# Altium PCB CU100_Weld_V1.0.PcbDoc
Units mm, origin at the board's own origin, x right, y up, seen from the top; angles counter-clockwise.
Board outline 100 x 85 mm, 2 copper layers (Top Layer, Bottom Layer); 31 components, 23 nets, 103 pads, 0 vias.
Unrouted connection lines stored in the file: 61.
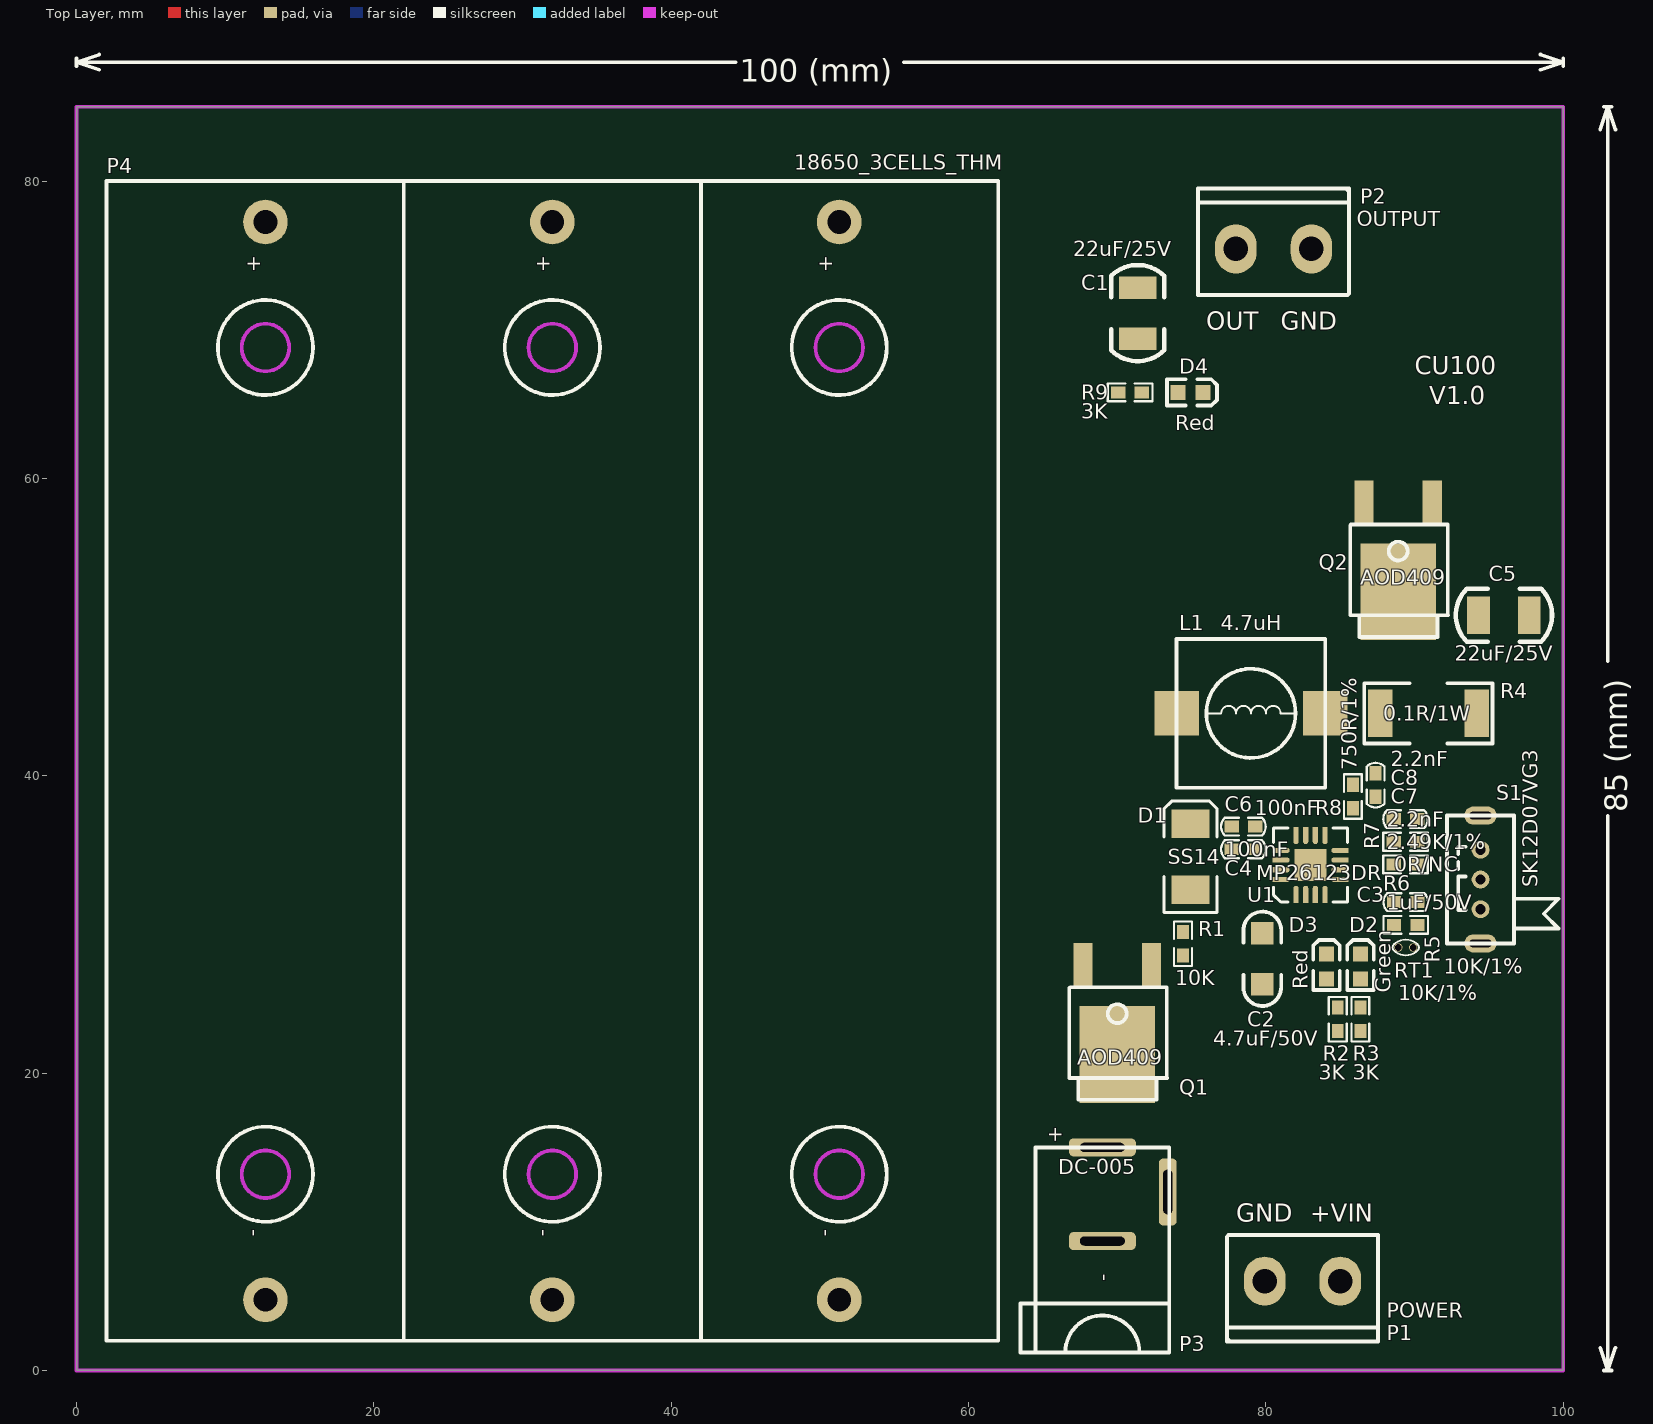
[diagram p0: Top Layer view]
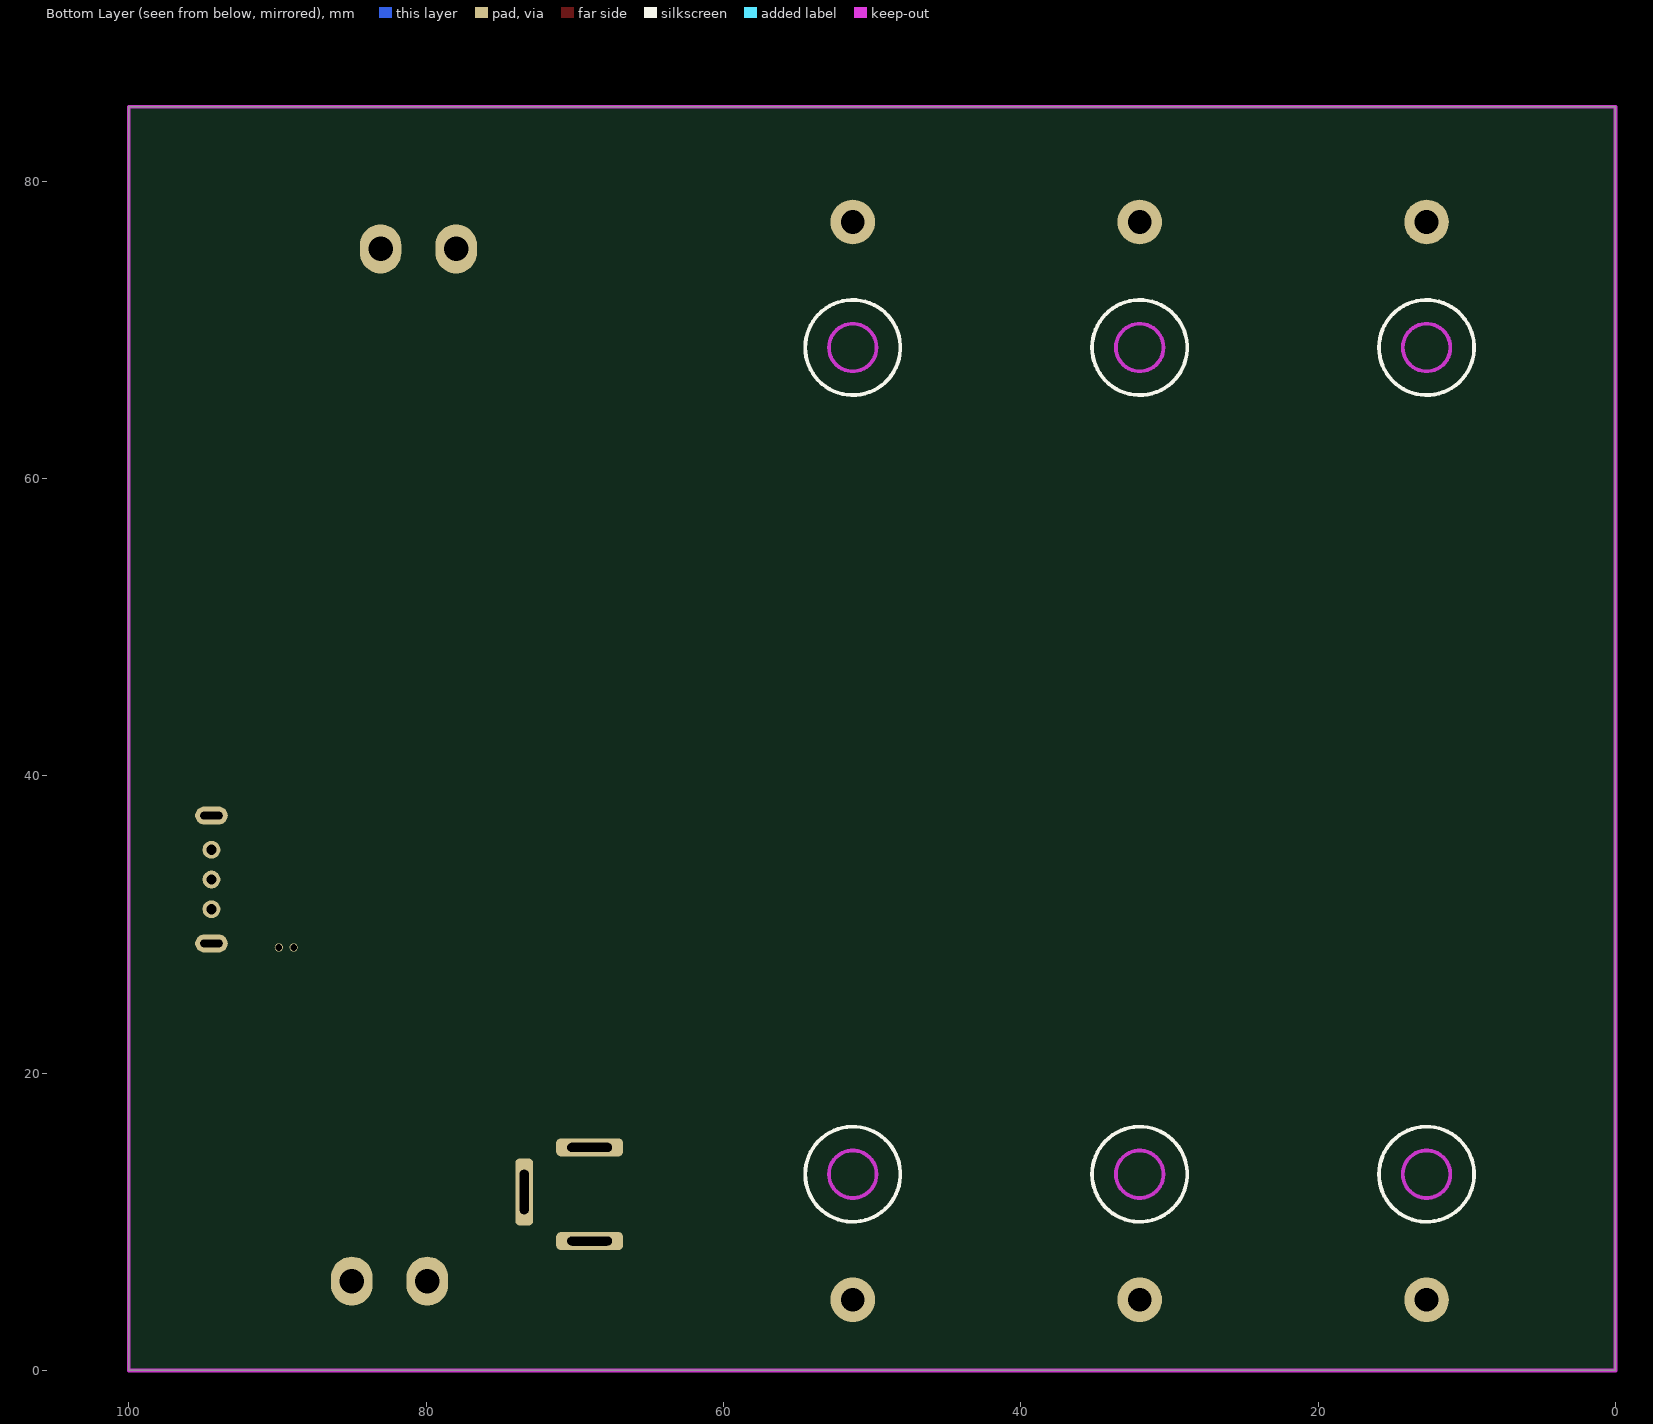
[diagram p1: Bottom Layer view, seen from below]

## Layer stack, top to bottom
Top Layer: signal copper 0.0356
Dielectric: dielectric 0.32, FR-4, Dk 4.8
Bottom Layer: signal copper 0.0356

## Board outline
0,0 100,0 100,85 0,85

## Design rules (kind name [scope] priority, off if disabled: settings)
Clearance [All] p1: gap=0.254
HoleSize [All] p1: absolutevalues=TRUE maxlimit=25.4 minlimit=0.025 maxpercent=80.000 minpercent=20.000
MinimumSolderMaskSliver [All] p1: minsoldermaskwidth=0
PolygonConnect isvia [isvia] p1: connectstyle=Direct reliefconductorwidth=0.254 reliefentries=4 polygonreliefangle="90 Angle"
PolygonConnect [All] p2: connectstyle=Relief reliefconductorwidth=0.762 reliefentries=4 polygonreliefangle="90 Angle"
RoutingVias [All] p1: holewidth=0.711 width=1.27 viastyle="Through Hole" minholewidth=0.711 minwidth=1.27 maxholewidth=0.711 maxwidth=1.27
SilkToSilkClearance [All] p1: silktosilkclearance=0
SilkscreenOverComponentPads [All] p1: minsilkscreentomaskgap=0
SolderMaskExpansion [All] p1: expansion=0.102
Width [All] p1: maxlimit=100 minlimit=0.254 preferedwidth=0.254
24 further rules are at their usual default settings.

## Components (designator, comment, footprint, x,y, rotation, side; value= is the part's Value field where it differs from the comment)
C1 "22uF/25V" 1210_C 71.374,71.12 r270 top
C2 "4.7uF/50V" 1206_C 79.756,27.686 r270 top
C3 "1uF/50V" 0603_CN 89.408,31.496 r0 top
C4 "100nF" 0603_CN 78.486,35.052 r0 top
C5 "22uF/25V" 1210_C 96.012,50.8 r0 top
C6 "100nF" 0603_CN 78.486,36.576 r180 top
C7 "2.2nF" 0603_CN 89.392,37.084 r0 top
C8 "2.2nF" 0603_CN 87.376,39.37 r90 top
D1 "SS14" DO-214AC(SMA) 74.93,34.544 r270 top
D2 "Green" 0603_LED 86.36,27.178 r270 top
D3 "Red" 0603_LED 84.074,27.178 r270 top
D4 "Red" 0603_LED 74.93,65.786 r180 top
L1 "4.7uH" CDRH104 78.994,44.196 r0 top
P1 "POWER" KF5.08-2P 85,6 r180 top locked
P2 "OUTPUT" KF5.08-2P 77.978,75.438 r0 top locked
P3 "DC-005" DC-5.5-2.1mm 69,15 r90 top locked
P4 "18650_3CELLS_THM" 18650_3CELLS_THM 2,80 r270 top locked
Q1 "AOD409" TO-252 70,24 r180 top
Q2 "AOD409" TO-252 88.9,55.118 r180 top
R1 "10K" 0603_RN 74.422,28.702 r90 top
R2 "3K" 0603_RN 84.836,23.622 r90 top
R3 "3K" 0603_RN 86.36,23.622 r270 top
R4 "0.1R/1W" 2512_R 90.932,44.196 r0 top
R5 "10K/1%" 0603_RN 89.408,29.972 r180 top
R6 "0R/NC" 0603_RN 89.392,34.036 r180 top
R7 "2.49K/1%" 0603_RN 89.392,35.56 r180 top
R8 "750R/1%" 0603_RN 85.852,38.608 r270 top
R9 "3K" 0603_RN 70.866,65.786 r0 top
RT1 "10K/1%" RT3950K 89.408,28.448 r180 top
S1 "SK12D07VG3" SK12D07VG3 94.488,33.02 r90 top
U1 "MP26123DR" QFN16(4X4) 83,34 r90 top

## Footprints (in the part's own frame and the unit in brackets; to place one, negate y for a bottom-side part, rotate by r counter-clockwise, add the part's x,y. Pads: shape width x height; smd on the part's side, far side on the other; paste and mask are expansions set on the pad)
0603_CN [mm] "SMD Resistor"
  rect 0.96x0.8 smd: 1(-0.79,0) 2(0.79,0)
  silkscreen extent -1.5,-0.6 1.5,0.6
0603_LED [mil] "SMD LED"
  rect 40x40 smd: A(33,0) K(-33,0)
  silkscreen extent -70,-35 63,35
0603_RN [mm] "SMD Resistor"
  rect 0.96x0.8 smd: 1(-0.79,0) 2(0.79,0)
  silkscreen extent -1.5,-0.6 1.5,0.6
1206_C [mil] "SMD Capacitor"
  rect 60x60 smd: 1(-67.5,0) 2(67.5,0)
  silkscreen extent -125,-50 125,50
1210_C [mil] "SMD Capacitor"
  rect 60x100 smd: 1(-67.5,0) 2(67.5,0)
  silkscreen extent -127,-70 127,70
2512_R [mm] "SMD Resistor"
  rect 1.65x3.2 smd: 1(-3.24,0) 2(3.24,0)
  silkscreen extent -4.32,-2.03 4.32,2.03
18650_3CELLS_THM [mm]
  round 3 hole 1.6: 1(2.75,10.7) 2(75.25,10.7) 3(2.75,30) 4(75.25,30) 5(2.75,49.3) 6(75.25,49.3)
  Keep-Out Layer circle w0.254: c11.195,49.3 r1.6
  Keep-Out Layer circle w0.254: c11.195,30 r1.6
  Keep-Out Layer circle w0.254: c11.195,10.7 r1.6
  Keep-Out Layer circle w0.254: c66.805,10.7 r1.6
  Keep-Out Layer circle w0.254: c66.805,30 r1.6
  Keep-Out Layer circle w0.254: c66.805,49.3 r1.6
  silkscreen extent 0,0 78,60
CDRH104 [mm] "SMD Power Inductance,L=10mm,W=10mm,H=4.2mm"
  rect 3x3 smd: 1(-5,0) 2(5,0)
  silkscreen extent -5,-5 5,5
DC-5.5-2.1mm [mm]
  rrect50% 1.2x4.5 hole 0.6 slot 3 at 90 deg: 1(0,0) 2(-6.3,0)
  rrect50% 4.5x1.2 hole 0.6 slot 3 at 0 deg: 3(-3,-4.4)
  silkscreen extent -13.8,-4.5 0,5.5
DO-214AC(SMA) [mil] "SMD Diode"
  rect 75x100 smd: A(87.5,0) K(-87.5,0)
  silkscreen extent -147,-70 148,70
KF5.08-2P [mil]
  oval 110x130 hole 65: 1(0,0) 2(200,0)
  silkscreen extent -100,-122 300,160
QFN16(4X4) [mm]
  rect 0.5x0.35 smd: 1(-2.3,0.975) 2(-2.3,0.325) 3(-2.3,-0.325) 4(-2.3,-0.975) 9(2.3,-0.975) 10(2.3,-0.325) 11(2.3,0.325) 12(2.3,0.975)
  oval 1x0.35 smd: 1(-1.9,0.975) 2(-1.9,0.325) 3(-1.9,-0.325) 4(-1.9,-0.975) 9(1.9,-0.975) 10(1.9,-0.325) 11(1.9,0.325) 12(1.9,0.975)
  rect 0.35x0.5 smd: 5(-0.975,-2.3) 6(-0.325,-2.3) 7(0.325,-2.3) 8(0.975,-2.3) 13(0.975,2.3) 14(0.325,2.3) 15(-0.325,2.3) 16(-0.975,2.3)
  oval 0.35x1 smd: 5(-0.975,-1.9) 6(-0.325,-1.9) 7(0.325,-1.9) 8(0.975,-1.9) 13(0.975,1.9) 14(0.325,1.9) 15(-0.325,1.9) 16(-0.975,1.9)
  rect 2.16x2.16 smd: PAD(0,0)
  silkscreen extent -2.5,-2.5 2.5,2.5
RT3950K [mm]
  round 0.55 hole 0.45: 1(-0.5,0) 2(0.5,0)
  silkscreen extent -0.88,-0.53 0.88,0.53
SK12D07VG3 [mm]
  oval 1.2x2.2 hole 0.5 slot 1.5 at 90 deg: 0(-4.3,0.05) 0(4.3,0.05)
  round 1.2 hole 0.7: 1(-2,0.05) 2(0,0.05) 3(2,0.05)
  silkscreen extent -4.3,-5.2 4.3,2.3
TO-252 [mm] "SMD IC"
  rect 1.3x3 smd: 1(-2.3,-3.245) 3(2.3,-3.245)
  rect 5.08x6.5 smd: 2(0,2.75)
  silkscreen extent -3.35,-1.78 3.22,5.79

## Part data
C1 C2 C3 C4 C5 C6 C7 C8: library part Cap1
D1: library part Diode-A, "SS14,SS24,SS34,M7"
D2 D3 D4: library part LED
L1: library part Inductor
P1 P2: library part "Header 2", "Header, 2-Pin"
R1 R2 R3 R4 R5 R6 R7 R8 R9: library part Res1
RT1: library part RT, "Thermistor"

## Nets (pads, with @x,y where several pads share a name; then routed paths per layer and width w, separated by ;. In a path a pad name is that pad's centre, name@x,y a point inside that pad or via, vN(x,y) a via of type N, cw(c..) or ccw(c..) an arc to the next point about the centre after c; other vN are vias at no path point)
+BATT: C5.1 P4.1 Q2.2 R4.2 U1.10
+VIN: P1.1 P3.1 Q1.2 Q2.1 R2.1 R3.2 U1.1
+VREF33: C3.1 R5.2 S1.1 U1.5
+VSYS: C1.1 C2.1 P2.1 Q1.3 Q2.3 R1.2 R9.1 U1.16
GND: C1.2 C2.2 C3.2 C5.2 C6.2 C7.2 C8.2 D1.A D4.K P1.2 P2.2 P3.2 P4.6 R6.1 RT1.2 S1.3 U1.12 U1.PAD
NetC4_1: C4.1 D1.K L1.1 U1.15
NetC4_2: C4.2 U1.14
NetC6_1: C6.1 U1.13
NetC7_1: C7.1 R7.1
NetC8_1: C8.1 R8.1
NetD2_A: D2.A R3.1
NetD2_K: D2.K U1.4
NetD3_A: D3.A R2.2
NetD3_K: D3.K Q1.1 R1.1 U1.3
NetD4_A: D4.A R9.2
NetL1_2: L1.2 R4.1 U1.11
NetP4_2: P4.2 P4.3
NetP4_4: P4.4 P4.5
NetR5_1: R5.1 RT1.1 U1.2
NetR6_2: R6.2 U1.7
NetR7_2: R7.2 U1.8
NetR8_2: R8.2 U1.9
NetS1_2: S1.2 U1.6
pads on no net: P3.3 S1.0

## Keep-outs
Keep-Out Layer:
  the board outline again, w0.254

## Silkscreen, mask and mechanical layers (free items; w line width, h text height)
Top Overlay:
  lines w0.254: 0,87.746 0,88.254 ; 1.524,87.492 0,88 ; 1.524,88.508 0,88 ; 44.344,88 0,88 ; 55.656,88 100,88 ; 98.476,87.492 100,88 ; 98.476,88.508 100,88 ; 100,87.746 100,88.254 ; 102.492,1.524 103,0 ; 102.492,83.476 103,85 ; 102.746,0 103.254,0 ; 102.746,85 103.254,85 ; 103,37.301 103,0 ; 103,47.699 103,85 ; 103.508,1.524 103,0 ; 103.508,83.476 103,85
  text "100 (mm)" at 44.598,86.687 h1.52
  text "OUT" at 76,70 h1.2
  text "GND" at 81,70 h1.2
  text "CU100" at 90,67 h1.2
  text "V1.0" at 91,65 h1.2
  text "85 (mm)" at 104.313,37.555 h1.52 r90
  text "GND" at 78,10 h1.2
  text "+VIN" at 83,10 h1.2

## Text inside footprints (layer, text, board x,y; h text height)
P3: Top Overlay "+" at 66.282,15.279 h1 r90; Top Overlay "-" at 69.5,6 h1 r90
P4: Top Overlay "+" at 11.5,75 h1 r270; Top Overlay "+" at 31,75 h1 r270; Top Overlay "+" at 50,75 h1 r270; Top Overlay "-" at 50,9.5 h1 r270; Top Overlay "-" at 31,9.5 h1 r270; Top Overlay "-" at 11.5,9.5 h1 r270